# Altium PCB SDP1.PcbDoc
Units mil, origin at the board's own origin, x right, y up, seen from the top; angles counter-clockwise.
Board outline 2955 x 6400 mil, 2 copper layers (Top Layer, Bottom Layer), stack 61.756 mil thick; 33 components, 36 nets, 160 pads, 33 vias.
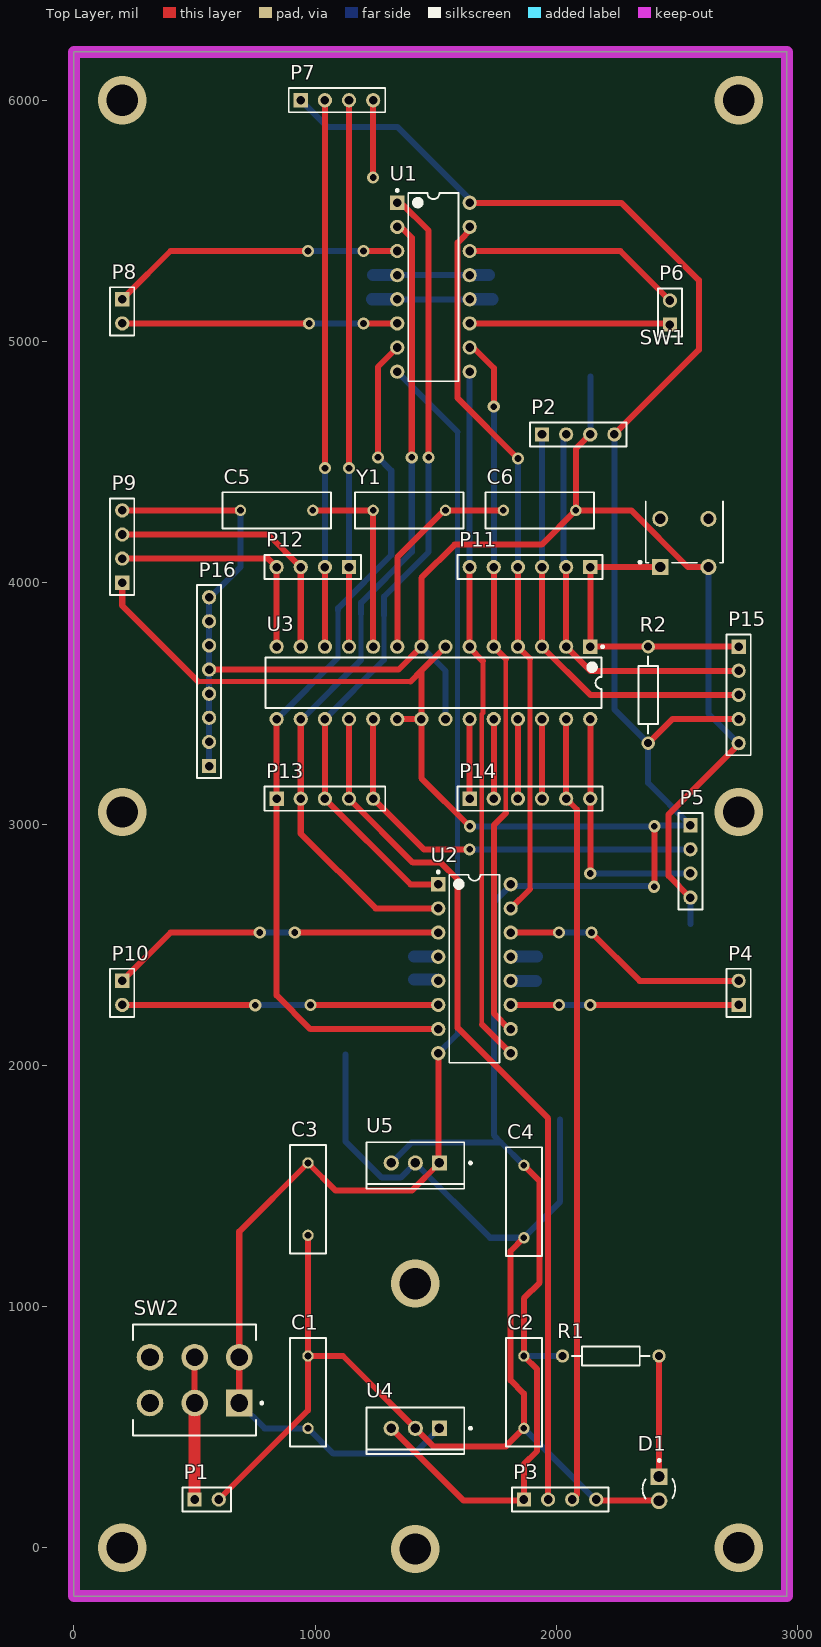
[diagram p0: Top Layer view]
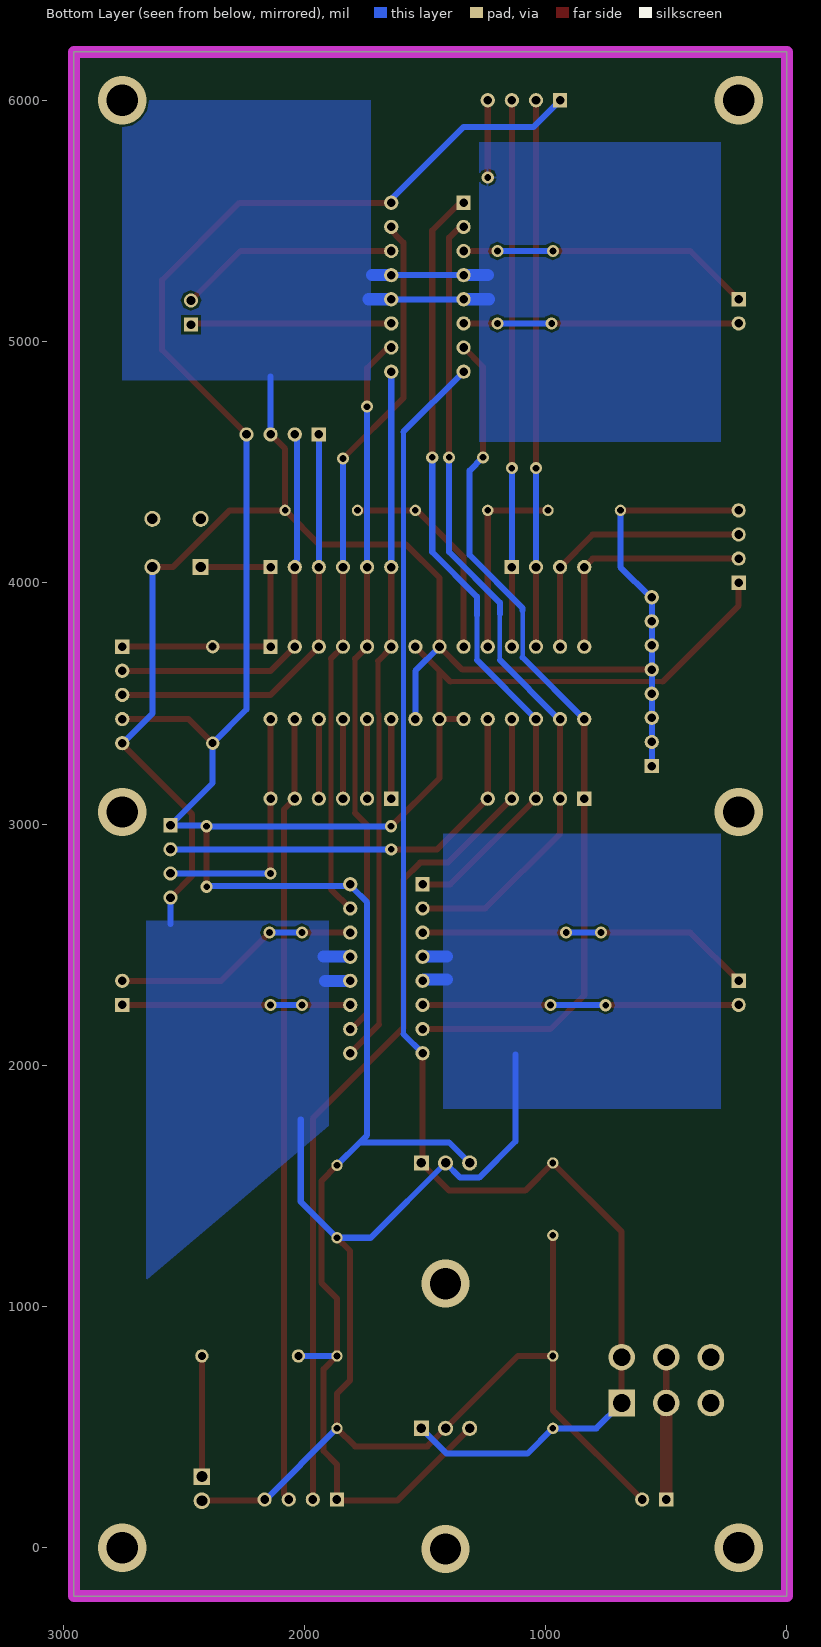
[diagram p1: Bottom Layer view, seen from below]

## Layer stack, top to bottom
Top Solder: solder mask 1, SM-001, Dk 4
Top Layer: signal copper 1.378
Dielectric 1: core 59, Core-043, Dk 4.3
Bottom Layer: signal copper 1.378
Bottom Solder: solder mask 1, SM-001, Dk 4

## Board outline
0,-200 2955,-200 2955,6200 0,6200

## Design rules (kind name [scope] priority, off if disabled: settings)
Clearance [All] p1: gap=10 ignorepadtopadclearanceinfootprint=FALSE except(0: Arc-Hole Track-Hole SMDPad-Hole THPad-Hole Via-Hole Fill-Hole Poly-Hole Region-Hole Text-Hole)
PolygonConnect [All] p1: connectstyle=Relief reliefconductorwidth=10 reliefentries=4 polygonreliefangle="90 Angle" airgapwidth=10
RoutingVias [All] p1: holewidth=28 width=50 viastyle="Through Hole" minholewidth=28 minwidth=50 maxholewidth=28 maxwidth=50
SolderMaskExpansion [All] p1: expansion=4 istentingtop=FALSE
Width Width_1 [All] p1: maxlimit=10 minlimit=10 preferedwidth=10
Width [All] p2: maxlimit=10 minlimit=10 preferedwidth=10
30 further rules are at their usual default settings.

## Classes and differential pairs
component class SeniorDesignPCB: C1 C2 C3 C4 C5 C6 D1 P1 R1 SW2 U3 U4 U5 Y1
component class ConnectionPinout: P2 P3 P4 P5 P6 P7 P8 P9 P10 P11 P12 P13 P14 P15 P16 R2 SW1 U1 U2

## Components (designator, comment, footprint, x,y, rotation, side; value= is the part's Value field where it differs from the comment)
C1 "Cap" RAD-0.3 970,645 r270 top value=100pF
C2 "Cap" RAD-0.3 1865,645 r90 top value=100pF
C3 "Cap" RAD-0.3 970,1445 r90 top value=100pF
C4 "Cap" RAD-0.3 1865,1435 r90 top value=100pF
C5 "Cap" RAD-0.3 840,4300 r0 top value=100pF
C6 "Cap" RAD-0.3 1930,4300 r180 top value=100pF
D1 "HLMP-1503" FP-HLMP-1503-MFG 2425,245 r270 top
P1 "Bat" HDR1X2 500,200 r0 top
P2 "BTM" HDR1X4 1940,4615 r0 top
P3 "USSB" HDR1X4 1865,200 r0 top
P4 "BR_Motor" HDR1X2 2755,2250 r90 top
P5 "USSR" HDR1X4 2555,2995 r270 top
P6 "FR_Motor" HDR1X2 2470,5070 r90 top
P7 "USSF" HDR1X4 940,6000 r0 top
P8 "FL_Motor" HDR1X2 200,5175 r270 top
P9 "USSL" HDR1X4 200,4000 r90 top
P10 "BL_Motor" HDR1X2 200,2350 r270 top
P11 "Reset-D4" HDR1X6 2140,4065 r180 top
P12 "D5-D8" HDR1X4 1140,4065 r180 top
P13 "D9-D13" HDR1X5 840,3105 r0 top
P14 "A0-A5" HDR1X6 1640,3105 r0 top
P15 "Upload" HDR1X5 2755,3735 r270 top
P16 "GNDPins" HDR1X8 560,3240 r90 top
R1 "Res2" AXIAL-0.4 2225,795 r0 top value=1K
R2 "Res2" AXIAL-0.4 2380,3535 r270 top value=1K
SW1 "TP11LT9ABE" FP-TP11LT9ABE-0 2530,4515.2 r180 top
SW2 "100DP1T2B3M2QEH" FP-100DP1T2B3M2QEH-MFG 500,695.08 r180 top
U1 "L293NE" NE0016A 1490,5225 r0 top
U2 "L293NE" NE0016A 1660,2400 r0 top
U3 "ATmega328-PU" 28P3 1490,3585 r270 top
U4 "MC7805CTG" ONSC-TO-220-3-221AB-01 1415,495 r270 top
U5 "MC7805CTG" ONSC-TO-220-3-221AB-01 1415,1595 r270 top
Y1 "Oscillator" RAD-0.3 1390,4300 r180 top value=100pF

## Footprints (in the part's own frame and the unit in brackets; to place one, negate y for a bottom-side part, rotate by r counter-clockwise, add the part's x,y. Pads: shape width x height; smd on the part's side, far side on the other; paste and mask are expansions set on the pad)
28P3 [mm] "28-Pin Plastic Dual In-Line Package (PDIP)"
  rect 1.5x1.5 hole 0.9: 1(-3.81,16.51)
  round 1.5 hole 0.9: 2(-3.81,13.97) 3(-3.81,11.43) 4(-3.81,8.89) 5(-3.81,6.35) 6(-3.81,3.81) 7(-3.81,1.27) 8(-3.81,-1.27) 9(-3.81,-3.81) 10(-3.81,-6.35) 11(-3.81,-8.89) 12(-3.81,-11.43) 13(-3.81,-13.97) 14(-3.81,-16.51) 15(3.81,-16.51) 16(3.81,-13.97) 17(3.81,-11.43) 18(3.81,-8.89) 19(3.81,-6.35) 20(3.81,-3.81) 21(3.81,-1.27) 22(3.81,1.27) 23(3.81,3.81) 24(3.81,6.35) 25(3.81,8.89) 26(3.81,11.43) 27(3.81,13.97) 28(3.81,16.51)
  silkscreen extent -3.93,-17.7 2.65,17.94, body extent -3.6,-17.65 3.6,17.65, height 4.58
AXIAL-0.4 [mm] "Axial Device, Thru-Hole; 2 Leads; 0.4 in Pin Spacing"
  round 1.4 hole 0.85: 1(-5.08,0) 2(5.08,0)
  silkscreen extent -4.06,-1.02 4.06,1.02
FP-100DP1T2B3M2QEH-MFG [mm]
  rect 2.8x2.8 hole 1.85 paste-1000 mask+0: 1(-4.7,2.415)
  round 2.8 hole 1.85 paste-1000 mask+0: 2(0,2.415) 3(4.7,2.415) 4(-4.7,-2.415) 5(0,-2.415) 6(4.7,-2.415)
  silkscreen extent -7.2,-5.84 6.48,5.84, body extent -6.58,-5.94 6.58,5.94, height 0.25
FP-HLMP-1503-MFG [mm]
  rect 1.75x1.75 hole 1.15 paste-1000 mask+0: 1(-1.27,0)
  round 1.75 hole 1.15 paste-1000 mask+0: 2(1.27,0)
  silkscreen extent -3.1,-1.73 1.02,1.71, body extent -2.42,-2.42 2.42,2.42, height 0.25
FP-TP11LT9ABE-0 [mm]
  rect 1.69x1.69 hole 1.09 paste-1000 mask+0: 1(2.54,11.435)
  round 1.69 hole 1.09 paste-1000 mask+0: 3(-2.54,11.435) 4(-2.54,6.355) 5(2.54,6.355)
  silkscreen extent -4.07,4.5 4.79,11.05, body extent -4.17,-11.08 4.17,12.38, height 0.25
HDR1X2 [mm] "Connector; Header; 2 Position"
  rect 1.5x1.5 hole 0.9: 1(0,0)
  round 1.5 hole 0.9: 2(2.54,0)
  silkscreen extent -1.27,-1.27 3.81,1.27
HDR1X4 [mm] "Connector; Header; 4 Position"
  rect 1.5x1.5 hole 0.9: 1(0,0)
  round 1.5 hole 0.9: 2(2.54,0) 3(5.08,0) 4(7.62,0)
  silkscreen extent -1.27,-1.27 8.89,1.27
HDR1X5 [mm] "Connector; Header; 5 Position"
  rect 1.5x1.5 hole 0.9: 1(0,0)
  round 1.5 hole 0.9: 2(2.54,0) 3(5.08,0) 4(7.62,0) 5(10.16,0)
  silkscreen extent -1.27,-1.27 11.43,1.27
HDR1X6 [mm] "Connector; Header; 6 Position"
  rect 1.5x1.5 hole 0.9: 1(0,0)
  round 1.5 hole 0.9: 2(2.54,0) 3(5.08,0) 4(7.62,0) 5(10.16,0) 6(12.7,0)
  silkscreen extent -1.27,-1.27 13.97,1.27
HDR1X8 [mm] "Connector; Header; 8 Position"
  rect 1.5x1.5 hole 0.9: 1(0,0)
  round 1.5 hole 0.9: 2(2.54,0) 3(5.08,0) 4(7.62,0) 5(10.16,0) 6(12.7,0) 7(15.24,0) 8(17.78,0)
  silkscreen extent -1.27,-1.27 19.05,1.27
NE0016A [mm] "DIP, 16-Leads, Body 19.8x6.6mm, Pitch 2.54mm, Row Spacing 7.62mm"
  rect 1.5x1.5 hole 0.9: 1(-3.81,8.89)
  round 1.5 hole 0.9: 2(-3.81,6.35) 3(-3.81,3.81) 4(-3.81,1.27) 5(-3.81,-1.27) 6(-3.81,-3.81) 7(-3.81,-6.35) 8(-3.81,-8.89) 9(3.81,-8.89) 10(3.81,-6.35) 11(3.81,-3.81) 12(3.81,-1.27) 13(3.81,1.27) 14(3.81,3.81) 15(3.81,6.35) 16(3.81,8.89)
  silkscreen extent -3.93,-9.9 2.65,10.31, body extent -3.95,-9.9 3.95,9.9, height 5.08
ONSC-TO-220-3-221AB-01 [mm] "FM, 3-Leads, Body 10.3x4.85mm, Pitch 2.54mm"
  rect 1.6x1.6 hole 1: 1(0,2.54)
  round 1.6 hole 1: 2(0,0) 3(0,-2.54)
  silkscreen extent -2.18,-5.15 2.72,5.93, body extent -2.16,-5.15 2.69,5.15, height 19.68
RAD-0.3 [mm] "Radial Cap, Thru-Hole; 2 Leads; 0.3 in Pin Spacing"
  round 1.2 hole 0.7: 1(-3.81,0) 2(3.81,0)
  silkscreen extent -5.71,-1.91 5.71,1.91

## Part data
C1 C2 C3 C4: "Capacitor 10 uF", LatestRevisionDate=17-Jul-2002, LatestRevisionNote="Re-released for DXP Platform.", PackageDescription="Radial Cap, Thru-Hole; 2 Leads; 0.3 in Pin Spacing", PackageReference=RAD-0.3, Published=8-Jun-2000, Publisher="Altium Limited"
C5 C6: "Capacitor 22 pF", LatestRevisionDate=17-Jul-2002, LatestRevisionNote="Re-released for DXP Platform.", PackageDescription="Radial Cap, Thru-Hole; 2 Leads; 0.3 in Pin Spacing", PackageReference=RAD-0.3, Published=8-Jun-2000, Publisher="Altium Limited"
D1: library part CMP-18399-000010-1, "LED GREEN DIFFUSED T-1 T/H", Colour=Green, Forward Current=10mA, Forward Voltage=2.1V, Manufacturer=Broadcom, Max Junction Temp=+110°C, Reverse Voltage=5V, Temperature="-20°C to +100°C", Temperature Range High=+100°C, Temperature Range Low=-20°C, Automotive=No, Category=Diode, ComponentLink2Description=Datasheet, ComponentLink2URL=https://docs.broadcom.com/docs/AV02-1555EN, Device Class L1=Optoelectronics, Device Class L2=LEDs, Device Class L3=unset, Digikey Description="LED GREEN DIFFUSED T-1 T/H", Height=6.35mm, Lead Free=Yes, Led Orientation=Straight, Luminous Intensity=1mcd, Manufacturer Part Number=HLMP-1503, Mouser Description="LED; Green; 1mcd; 0.115In.Dia.; T-1; 565nm; 25mA; 2.1V; 5V; GaP; -20degC; 100deg", Octopart=https://octopart.com/hlmp-1503-broadcom-71130371, Package=HLMP-1503, Peak Emmision Wavelength=565nm, RoHS=TRUE, Standoff Height=0.88mm, Viewing Angle=60°, Wavelength=569nm
P1 P4 P6 P8 P10: library part "Header 2", "Header, 2-Pin", LatestRevisionDate=17-Jul-2002, LatestRevisionNote="Re-released for DXP Platform.", Publisher="Altium Limited"
P2 P3 P5 P7 P9 P12: library part "Header 4", "Header, 4-Pin", LatestRevisionDate=17-Jul-2002, LatestRevisionNote="Re-released for DXP Platform.", Publisher="Altium Limited"
P11 P14: library part "Header 6", "Header, 6-Pin", LatestRevisionDate=17-Jul-2002, LatestRevisionNote="Re-released for DXP Platform.", Publisher="Altium Limited"
P13 P15: library part "Header 5", "Header, 5-Pin", LatestRevisionDate=17-Jul-2002, LatestRevisionNote="Re-released for DXP Platform.", Publisher="Altium Limited"
P16: library part "Header 8", "Header, 8-Pin", LatestRevisionDate=17-Jul-2002, LatestRevisionNote="Re-released for DXP Platform.", Publisher="Altium Limited"
R1: "Resistor 220 ohm", LatestRevisionDate=17-Jul-2002, LatestRevisionNote="Re-released for DXP Platform.", PackageDescription="Axial Device, Thru-Hole; 2 Leads; 0.4 in Pin Spacing", PackageReference=AXIAL-0.4, Published=8-Jun-2000, Publisher="Altium Limited"
R2: "Resistor 10k ohm", LatestRevisionDate=17-Jul-2002, LatestRevisionNote="Re-released for DXP Platform.", PackageDescription="Axial Device, Thru-Hole; 2 Leads; 0.4 in Pin Spacing", PackageReference=AXIAL-0.4, Published=8-Jun-2000, Publisher="Altium Limited"
SW1: library part CMP-10035-000001-1, "SWITCH PUSH SPST-NO 0.4VA 20V", Contact Resistance=20mΩ, Manufacturer="C&K Components", Temperature="-30°C to +85°C", Temperature Range High=+85°C, Temperature Range Low=-30°C, Voltage Rating Ac=20V, Automotive=No, Category=Switch, ComponentLink2Description=Datasheet, ComponentLink2URL=https://upverter.com/datasheet/0786a1a96b71ed81f4db7fca9904a91be8d020ff.pdf, Device Class L1=Electromechanical, Device Class L2=Switches, Device Class L3="Pushbutton Switches", Digikey Description="SWITCH PUSH SPST-NO 0.4VA 20V", Electromechanical Life=60000Cycles, Height=5.33mm, Lead Free=Yes, Manufacturer Part Number=TP11LT9ABE, Mount="Through Hole", Mouser Description="Pushbutton Switches Switch Pb Spst Mom Sealed Ra Pcb", Octopart=https://octopart.com/tp11lt9abe-c%26k+components-1173646, Package=TP11LT9ABE, RoHS=TRUE, Throw Configuration=SPST(NO), Voltage Rating Dc=20V
SW2: library part CMP-17880-000002-1, "SWITCH TOGGLE NON ILLUMINATED", Contact Current Rating=5A, Contact Resistance=10mΩ, Manufacturer=E-Switch, Package=0, Temperature="-30°C to +85°C", Temperature Range High=+85°C, Temperature Range Low=-30°C, Voltage Rating Ac=120V, Voltage Rating Dc=28V, Automotive=No, Category=Switch, ComponentLink2Description=Datasheet, ComponentLink2URL=http://spec_sheets.e-switch.com/specs/ST121094.pdf, Device Class L1=Electromechanical, Device Class L2=Switches, Device Class L3="Toggle Switches", Digikey Description="SWITCH TOGGLE NON ILLUMINATED", Electromechanical Life=40000Cycles, Footprint Url=http://spec_sheets.e-switch.com/specs/ST121094.pdf, Height=23.6mm, Lead Free=Yes, Manufacturer Part Number=100DP1T2B3M2QEH, Mount="Through Hole", Mouser Description="Toggle Switches 5A 120VAC/28VDC On-None-On PC Mnt", Octopart=https://octopart.com/100dp1t2b3m2qeh-e-switch-7054946, RoHS=TRUE, Throw Configuration=DPDT
U1 U2: library part CMP-2000-04965-1, "Quadruple Half-H Driver, 4.5 to 36 V, 0 to 70 degC, 16-Pin DIP, Pb-Free, Tube", Manufacturer="Texas Instruments", Maximum Operating Current=24mA, Operating Temperature=0to70degC, Package=16PDIP, Package Description="16-Pin Plastic Dual-In-Line Package, Body 19.8 x 6.35 mm, Pitch 2.54 mm", Package Reference=NE16, Package Version="4040054/B, 04/1995", Category=MotionMotorControl, Datasheet URL=http://www.ti.com/general/docs/lit/getliterature.tsp?genericPartNumber=l293d&fileType=pdf, Datasheet Version="Rev. D, 01/2016", Manufacturer URL=http://www.ti.com/, Mounting=ThroughHole, Package URL=http://www.ti.com/litv/pdf/mpdi003, Packaging=Rail/Tube, Rad Hard=No, Type=4-ChannelMotorDriver
U3: library part CMP-0095-00015-2, "8-bit AVR Microcontroller, 32KB Flash, 1KB EEPROM, 2KB SRAM, 28-pin PDIP, Industrial Grade (-40°C to 85°C)", ComponentLink1Description="Manufacturer URL", ComponentLink1URL=http://www.atmel.com/, ComponentLink2Description="ATmega48A/48PA/88A/88PA/168A/168PA/328/328P Datasheet", ComponentLink2URL=http://www.atmel.com/dyn/resources/prod_documents/8271.pdf, ComponentLink3Description="ATmega48A/48PA/88A/88PA/168A/168PA/328/328P Summary", ComponentLink3URL=http://www.atmel.com/dyn/resources/prod_documents/8271S.pdf, DatasheetVersion="revD, May-2011", PackageDescription="28-lead (0.300\"/7.62mm Wide) Plastic Dual Inline Package (PDIP)", PackageReference=28P3, PackageVersion="revB, Sep-2001", RevisionNote="DatasheetVersion updated. URLs added."
U4 U5: library part CMP-2000-04928-1, "Positive Voltage Regulator, 1 A, 5 V, 0 to 125 degC, 3-Pin TO-220, RoHS, Tube", Current, Output, Maximum=1A, Current, Quiescent Supply=6.5mA, Current, Supply=3.2mA, Dropout Voltage=2V, Manufacturer="ON Semiconductor", Package Description="3-Pin Flange Mount, Vertical Straight Lead, Body 9.97 x 4.445 mm, Pitch 2.54 mm", Package Reference=TO-220-3-221AB-01, Package Type=TO-220, Package Version="Rev. A, 11/2010", Resistance, Thermal, Junction to Case=5degC/W, Temperature, Operating, Maximum=+125degC, Temperature, Operating, Minimum=0degC, Temperature, Operating, Range=0to+125degC, Voltage, Input Range=Maximumof35V, Voltage, Input, High Level=35V, Voltage, Noise=10μV/V, Voltage, Output=5V, Datasheet URL=http://www.onsemi.com/pub_link/Collateral/MC7800-D.PDF, Datasheet Version="Rev. 27, 11/2014", Dimensions=10.28x4.82x15.75mm, Dropout Voltage Measurement Current=1A, Height=15.75mm, Length=10.28mm, Line Regulation=20mV, Load Regulation=25mV, Manufacturer URL=http://www.onsemi.com/, Mounting Type=ThroughHole, Number of Outputs=1, Number of Pins=3, Output Type=Fixed, Polarity=Positive, Regulation, Line=0.5mV, Regulation, Load=1.3mV, Regulator Function=Standard, Regulator Type=PositiveVoltageOut, Type=VoltageRegulator, Voltage, Dropout=2V, Voltage, Supply=35V, Width=4.82mm
Y1: library part Cap, "16 MHz oscillator", LatestRevisionDate=17-Jul-2002, LatestRevisionNote="Re-released for DXP Platform.", PackageDescription="Radial Cap, Thru-Hole; 2 Leads; 0.3 in Pin Spacing", PackageReference=RAD-0.3, Published=8-Jun-2000, Publisher="Altium Limited"

## Via types
v1: diameter 50, hole 28, Top Layer to Bottom Layer, 25 vias
v2: diameter 200, hole 130, Top Layer to Bottom Layer, 8 vias

## Nets (pads, with @x,y where several pads share a name; then routed paths per layer and width w, separated by ;. In a path a pad name is that pad's centre, name@x,y a point inside that pad or via, vN(x,y) a via of type N, cw(c..) or ccw(c..) an arc to the next point about the centre after c; other vN are vias at no path point)
GND: C1.1 C2.1 C3.1 C4.1 C5.1 C6.1 D1.2 P1.2 P2.3 P3.4 P5.4 P7.4 P9.4 P15.5 P16.1 P16.2 P16.3 P16.4 P16.5 P16.6 P16.7 P16.8 SW1.3 U1.4 U1.5 U1.12 U1.13 U2.4 U2.5 U2.12 U2.13 U3.8 U3.22 U4.2 U5.2 | length 14269.3
  Top Layer w25: P9.4 C5.1 ; P16.5 1345,3640 U3.8 1440,4020 1578.16,4158.16 1938.16,4158.16 C6.1 ; P16.8 P16.8@565,3940 ; P1.2 970,570 C1.1 ; C3.1 C1.1 ; v1(1240,5680) P7.4 ; C4.1 1810,1230 1810,693.73 1865,638.73 C2.1 1790,420 1490,420 U4.2 1115,795 C1.1 ; P2.3 2080,4555 C6.1 ; P3.4@2165,195 D1.2 ; P5.4 2465,2785 2465,3040 2755,3330 P15.5 ; SW1.3 2545,4065 2310,4300 C6.1
  Bottom Layer w10: U2.5@1505,2355 U2.5 ; U2.4@1505,2445 U2.4
  Bottom Layer w25: P16.1 P16.2 P16.3 P16.4 P16.5 P16.6 P16.7 P16.8 ; P16.8@565,3940 690,4065 C5.1 ; 1125,2045 1125,1685 1275.86,1534.14 1354.14,1534.14 U5.2 1725,1285 C4.1 2015,1435 2015,1775 ; U1.5 U1.12 ; U1.4 U1.13 ; U3.8 1540,3635 U3.22 ; C2.1 P3.4@2165,195 ; P2.3 2140,4855 ; 2555,2585 P5.4 ; SW1.3 2630,3457.5 P15.5@2755,3332.5
  Bottom Layer w50: 1235,5175 U1.5 ; 1240,5275 U1.4 ; 1410,2355 U2.5@1505,2355 ; 1410,2450 U2.4 ; U1.12 1735,5175 ; U1.13 1720,5275 ; U2.12 1915,2350 ; U2.13 1920,2450
NetC1_2: C1.2 C3.2 SW2.1 SW2.4 U1.8 U2.8 U4.1 U5.1 | length 6151.9
  Top Layer w10: U5.1@1510,1600 U5.1
  Top Layer w25: SW2.1 SW2.4 685.04,1310.04 C3.2 1085,1480 1400,1480 U5.1 ; U5.1@1496,1614 1510,1600 U2.8
  Bottom Layer w20: 1589.53,2129.53 1589.53,4625.47
  Bottom Layer w25: SW2.1 790.04,495 C1.2 1075,390 1410,390 U4.1 ; U1.8 1589.53,4625.47 ; U2.8 1589.53,2129.53
NetC2_2: C2.2 C4.2 P2.4 P3.1 P5.1 P7.1 P9.1 P15.4 R1.1 R2.2 U1.16 U2.16 U3.7 U3.20 U3.21 U4.3 U5.3 | length 13190.9
  Top Layer w20: 515,3590 1395,3590
  Top Layer w25: P9.1 200,3905 515,3590 ; U4.3 1615,195 1865,195 P3.1 1865,345.95 1920,400.95 1920,740 C2.2 1865,1033.73 1930,1098.73 1930,1520 C4.2 ; U3.20 U3.21 ; 1395,3590 1440,3635 ; U3.7 1440,3635 ; v1(1640.62,2990.62) 1639.38,2990.62 1440,3190 U3.21 ; U1.16@1655,5575 2269.14,5575 2590,5254.14 2590,4965 P2.4 ; R2.2 2480,3435 P15.4 ; v1(2405,2740) 2405.62,2740.62 v1(2405.62,2990.62) ; U3.21 1440,3635
  Bottom Layer w10: U2.16@1802.5,2742.5 U2.16 U2.16@1810,2750.78
  Bottom Layer w25: P7.1 1050,5890 1340,5890 U1.16@1655,5575 ; U5.3 1400,1680 1770,1680 ; v1(1640.62,2990.62) 1641.25,2990 2405,2990 v1(2405.62,2990.62) 2408.58,2993.58 2553.58,2993.58 P5.1 2380,3170 R2.2 2240,3475 P2.4 ; U2.16@1802.5,2742.5 1802.5,2737.5 1740,2675 1740,1710 1770,1680 ; U2.16 1816.52,2743.48 2401.52,2743.48 v1(2405,2740) ; C2.2 R1.1 ; C4.2 1770,1680
NetC5_2: C5.2 U3.10 Y1.2 | length 818.5
  Top Layer w10: U3.10@1237.5,3737.5 U3.10
  Top Layer w25: C5.2 Y1.2 U3.10
NetC6_2: C6.2 U3.9 Y1.1 | length 890.8
  Top Layer w25: U3.9 1340,4105 1535,4300 C6.2
NetD1_1: D1.1 R1.2 | length 500
  Top Layer w25: D1.1 R1.2
NetP1_1: P1.1 SW2.2 SW2.5 | length 590.2
  Top Layer w25: SW2.2 SW2.5
  Top Layer w50: P1.1 SW2.2
NetP2_1: P2.1 P11.3 P15.3 U3.3 | length 1777.8
  Top Layer w25: P11.3 U3.3 2140,3535 P15.3
  Bottom Layer w25: P11.3 P2.1
NetP2_2: P2.2 P11.2 P15.2 U3.2 | length 1644.7
  Top Layer w25: P11.2 U3.2 2140,3635 P15.2
  Bottom Layer w25: P11.2 2033.48,4071.52 2033.48,4093.19 2030,4096.67 2030,4595.78 2040,4605.78 P2.2
NetP3_2: P3.2 P13.4 U3.18 | length 3644.1
  Top Layer w25: U3.18 P13.4 1405,2840 1520,2840 1590,2770 1590,2155 1965,1780 P3.2
NetP3_3: P3.3 P14.5 U3.27 | length 3271.1
  Top Layer w10: P3.3 P3.3@2085,220
  Top Layer w25: P14.5@2033.48,3111.52 P14.5 ; U3.27 P14.5 ; P3.3@2085,220 2085,3060 P14.5
NetP4_1: P4.1 U2.11 | length 952.1
  Top Layer w10: P4.1@2750,2245 P4.1
  Top Layer w25: U2.11 v1(2010,2250) ; v1(2140,2250) P4.1
  Bottom Layer w25: v1(2010,2250) v1(2140,2250)
NetP4_2: P4.2 U2.14 | length 1027.8
  Top Layer w25: U2.14 v1(2010,2550) ; v1(2145,2550) 2345,2350 P4.2
  Bottom Layer w25: v1(2010,2550) v1(2145,2550)
NetP5_2: P5.2 P13.5 U3.19 | length 1741.2
  Top Layer w25: P13.5@1240,3095.78 U3.19 ; P13.5 1450,2895 v1(1640,2895)
  Bottom Layer w25: v1(1640,2895) P5.2
NetP5_3: P5.3 P14.6 U3.28 | length 1055
  Top Layer w25: v1(2140,2795) P14.6 U3.28
  Bottom Layer w25: v1(2140,2795) P5.3
NetP6_1: P6.1 U1.11 | length 817.1
  Top Layer w10: P6.1@2465,5075 P6.1
  Top Layer w25: U1.11@1655,5075 P6.1@2465,5075
NetP6_2: P6.2 U1.14 | length 899.9
  Top Layer w25: U1.14@1655,5375 2265,5375 P6.2
NetP7_2: P7.2 P12.2 U3.12 | length 2265
  Top Layer w25: U3.12 P12.2 ; v1(1040,4475) P7.2
  Bottom Layer w25: P12.2 v1(1040,4475)
NetP7_3: P7.3 P12.1 U3.11 | length 2265
  Top Layer w25: U3.11 P12.1 ; v1(1140,4475) P7.3
  Bottom Layer w25: P12.1 v1(1140,4475)
NetP8_1: P8.1 U1.3 | length 1222.8
  Top Layer w25: P8.1 217.03,5192.03 400,5375 v1(970,5375) ; v1(1200,5375) U1.3
  Bottom Layer w25: v1(970,5375) v1(1200,5375)
NetP8_2: P8.2 U1.6 | length 1140
  Top Layer w25: P8.2 v1(975,5075) ; v1(1200,5075) U1.6
  Bottom Layer w25: v1(975,5075) v1(1200,5075)
NetP9_2: P9.2 P12.4 U3.14 | length 984.5
  Top Layer w25: P9.2 805,4100 P12.4 U3.14
NetP9_3: P9.3 P12.3 U3.13 | length 1125.9
  Top Layer w25: P9.3 805,4200 P12.3 U3.13
NetP10_1: P10.1 U2.3 | length 1392.8
  Top Layer w25: P10.1 400,2550 v1(770,2550) ; v1(915,2550) U2.3
  Bottom Layer w25: v1(770,2550) v1(915,2550)
NetP10_2: P10.2 U2.6 | length 1311
  Top Layer w25: P10.2 750,2250 v1(751.25,2248.75) ; v1(980,2250) U2.6
  Bottom Layer w25: v1(751.25,2248.75) 752.5,2250 v1(980,2250)
NetP11_1: P11.1 P15.1 R2.1 SW1.1 U3.1 | length 1235
  Top Layer w25: SW1.1 P11.1 U3.1 R2.1 P15.1
NetP11_4: P11.4 U1.15 U2.15 U3.4 | length 3009.3
  Top Layer w20: 1890,2730 1890,3685
  Top Layer w25: U1.15@1655,5475 1590,5410 1590,4765 v1(1840,4515) ; U2.15 1890,2730 ; P11.4 U3.4 1890,3685
  Bottom Layer w25: P11.4 v1(1840,4515)
NetP11_5: P11.5 U1.10 U2.10 U3.5 | length 2933.6
  Top Layer w20: 1790,3045 1790,3685
  Top Layer w25: U1.10@1655,4975 1740,4890 v1(1740,4730) ; P11.5 U3.5 1790,3685 ; 1790,3045 1740,2995 1740,2215 1805,2150 U2.10
  Bottom Layer w25: P11.5 v1(1740,4730)
NetP11_6: P11.6 U1.9 U2.9 U3.6 | length 2901.2
  Top Layer w20: 1690.47,2169.53 1690.47,3455.52 1695,3460.04 1695,3675
  Top Layer w25: P11.6 1640,3730 1695,3675 ; 1690.47,2169.53 U2.9
  Bottom Layer w25: P11.6 1640,4870 U1.9@1645,4875
NetP13_1: P13.1 U1.7 U2.7 U3.15 | length 3665.7
  Top Layer w25: U3.15 P13.1 840,2290 980,2150 U2.7 ; v1(1260,4520) 1260,4895 U1.7
  Bottom Layer w20: 1095,3690 1095,3885
  Bottom Layer w25: U3.15 1095,3690 ; 1095,3885 1095,3895 1315,4115 1315,4465 v1(1260,4520)
NetP13_2: P13.2 U1.2 U2.2 U3.16 | length 3428.4
  Top Layer w10: U1.2@1350,5475 1350,5470 U1.2@1355,5470
  Top Layer w25: U3.16 P13.2 940,3025 940,2960 1250,2650 U2.2 ; U1.2@1360,5470 1400,5430 v1(1400,4520)
  Bottom Layer w10: U3.16 U3.16@945,3435
  Bottom Layer w20: 1190,3680 1190,3870
  Bottom Layer w25: U3.16@945,3435 1190,3680 ; 1190,3870 1190,3917.5 1400,4127.5 v1(1400,4520)
NetP13_3: P13.3 U1.1 U2.1 U3.17 | length 3312.8
  Top Layer w25: U3.17 P13.3 1395,2750 U2.1 ; U1.1@1355,5575 1470,5460 v1(1470,4520)
  Bottom Layer w20: 1285,3680 1285,3865
  Bottom Layer w25: U3.17 1285,3680 ; 1285,3865 1285,3942.5 1470,4127.5 v1(1470,4520)
NetP14_1: P14.1 U3.23 | length 330
  Top Layer w25: P14.1 U3.23
NetP14_2: P14.2 U3.24 | length 330
  Top Layer w25: P14.2 U3.24
NetP14_3: P14.3 U3.25 | length 330
  Top Layer w25: P14.3 U3.25
NetP14_4: P14.4 U3.26 | length 339.2
  Top Layer w25: P14.4@1930.78,3105 P14.4 U3.26
pads on no net: SW1.4 SW1.5 SW2.3 SW2.6
copper on no net:
  other v2: 1415,-5 200,0 2755,0 1415,1095 200,3050 2755,3050 200,6000 2755,6000

## Polygon pours and split planes (outlines as drawn)
no net on Top Layer "NONET_L01_P002" (solid, pour order 2): 970,2600
no net on Top Layer "NONET_L01_P001" (solid, pour order 1): 900,2595
GND on Bottom Layer "GND_L02_P003" (solid, pour order 3): 1725,6000 1725,4840 2755,4840 2755,6000
GND on Bottom Layer "GND_L02_P006" (solid, pour order 6): 1900,2600 1900,1750 2655,1110 2655,2600
GND on Bottom Layer "GND_L02_P005" (solid, pour order 5): 1425,1820 1425,2960 275,2960 275,1820
GND on Bottom Layer "GND_L02_P004" (solid, pour order 4): 1275,4585 1275,5825 275,5825 275,4585

## Keep-outs
Keep-Out Layer:
  the board outline again, w50